# EAGLE board Board (EAGLE 9.2.2)
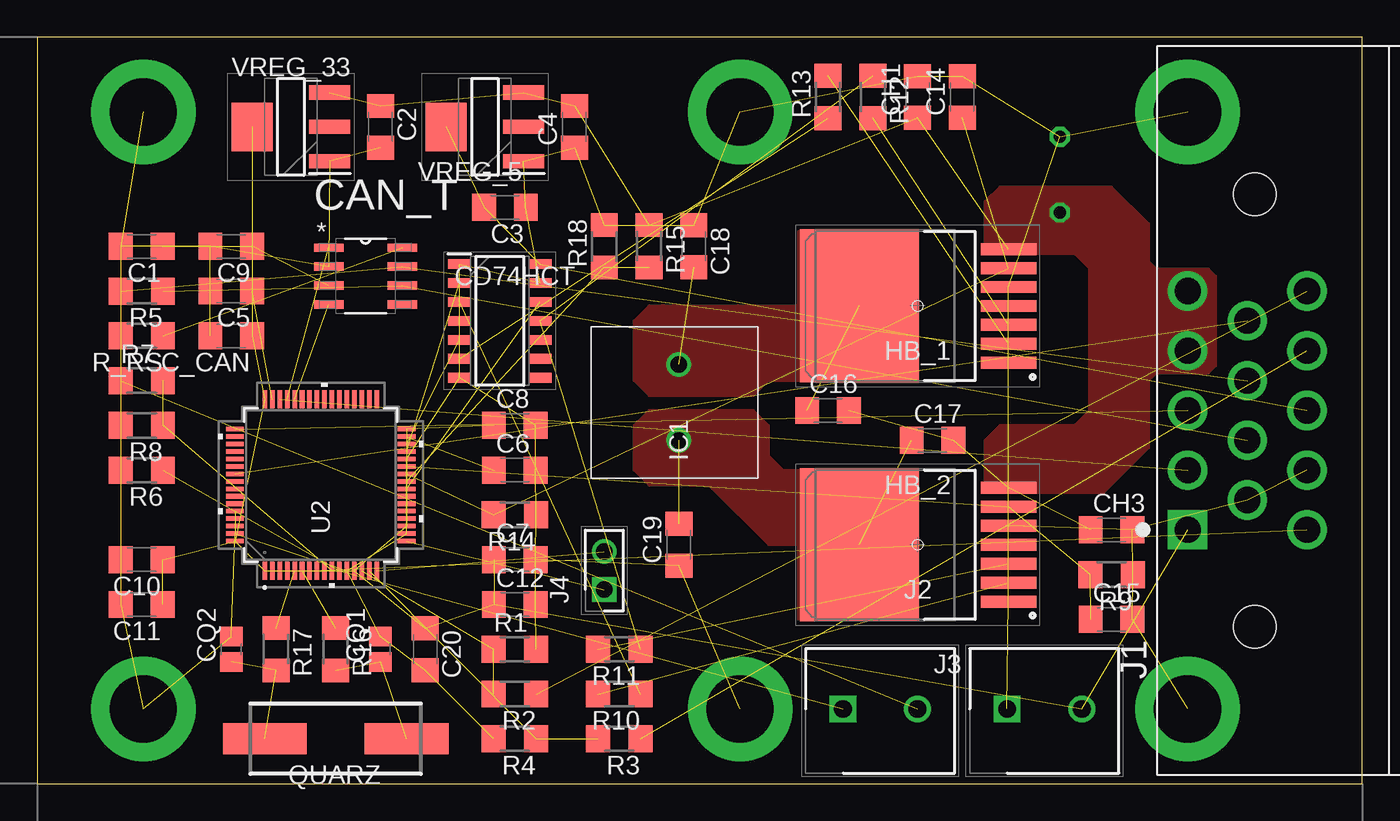
[diagram p0: board, top side]
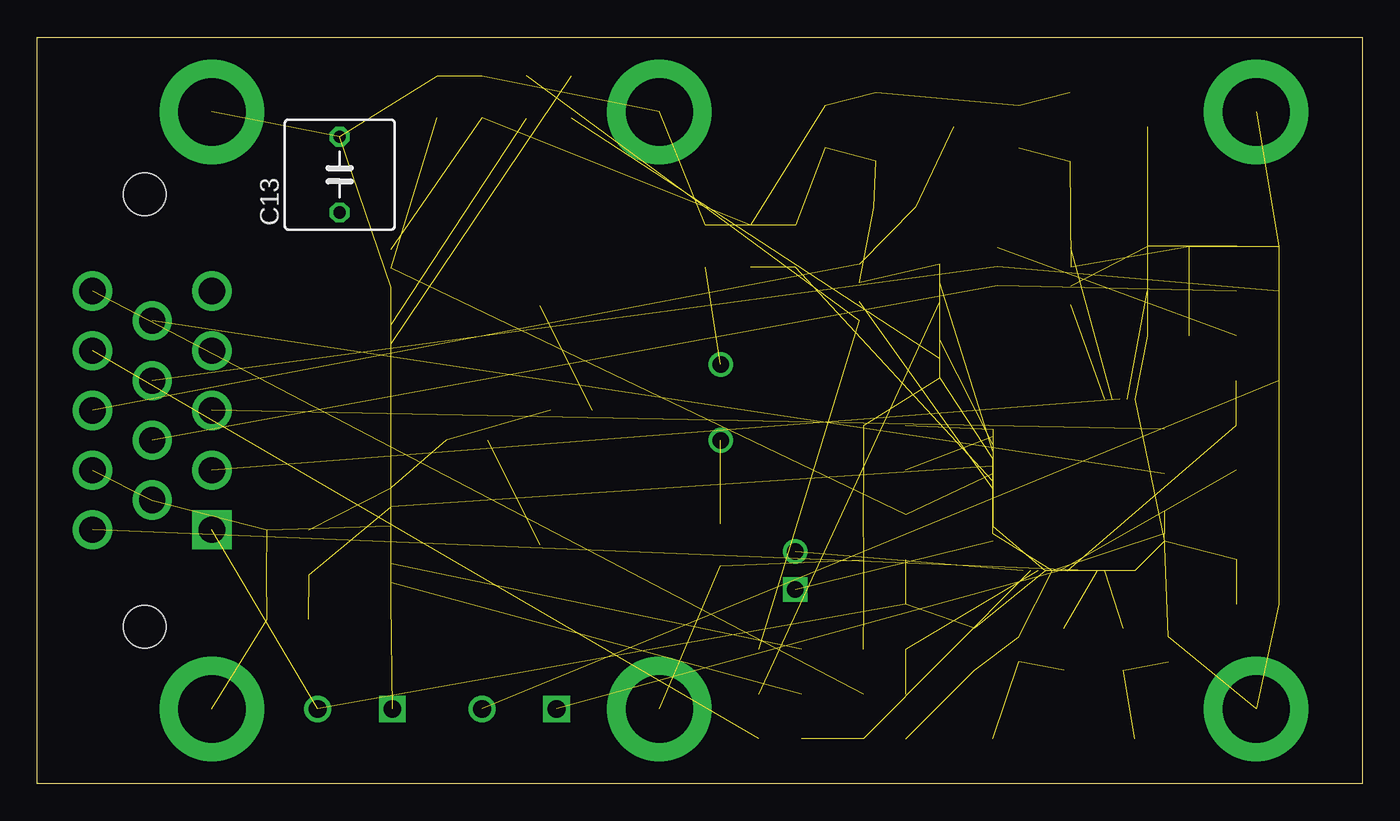
[diagram p1: board, bottom side, seen from below]

Size 88.8 x 50 mm. Coordinates in mm from the lower left corner, seen from the top.
Outline: 0,0 88.8,0 88.8,50 0,50 0,0
Copper layers (1*16): Top 0.035mm / dielectric 1.5mm / Bottom 0.035mm
Design rules "default": minimum track width 6mil, minimum drill 0.35mm, track to track 6mil, track to pad 6mil, pad to pad 6mil, via to via 6mil, smd to smd 6mil, copper to edge 40mil, drill to drill 6mil, minimum pad ring 10mil, minimum via ring 8mil, stop-mask expansion 4mil, vias tented up to drill 0mil, thermal gap 10mil
Net classes: 0 default: width 0.2 mm, drill 0.508 mm; 1 V12: width 0.6 mm, drill 0.8 mm

## Footprints (pad centres in the part's own frame; a part is rotated, then mirrored left to right if it is on the bottom)
C1206 = smd 1.6 x 1.8: 1 -1.4,0; 2 1.4,0
C050-075X075 = drill 0.813 octagon: 1 -2.54,0; 2 2.54,0
SOIC127P600X175-8N = smd 1.981 x 0.559: 1 -2.464,1.905; 2 -2.464,0.635; 3 -2.464,-0.635; 4 -2.464,-1.905; 5 2.464,-1.905; 6 2.464,-0.635; 7 2.464,0.635; 8 2.464,1.905
SOIC127P600X175-14N = smd 1.525 x 0.65: 1 -2.712,3.81; 2 -2.712,2.54; 3 -2.712,1.27; 4 -2.712,0; 5 -2.712,-1.27; 6 -2.712,-2.54; 7 -2.712,-3.81; 8 2.712,-3.81; 9 2.712,-2.54; 10 2.712,-1.27; 11 2.712,0; 12 2.712,1.27; 13 2.712,2.54; 14 2.712,3.81
C0805 = smd 1.3 x 1.5: 1 -0.85,0; 2 0.85,0
TO127P1500X440-8N = smd 3.7 x 0.8: 1 -6.1,3.81; 2 -6.1,2.54; 3 -6.1,1.27; 4 -6.1,0; 5 -6.1,-1.27; 6 -6.1,-2.54; 7 -6.1,-3.81 | smd 8 x 10.25: 8 3.9,0
PHEONIX-5.08PITCH-2PIN = drill 1.1 pad 1.65: 1 0,0; 2 5.08,0
TE_1-776267-1 = drill 1.75 square: 1 -8,4.5 | drill 1.75: 2 -4,4.5; 3 0,4.5; 4 4,4.5; 5 8,4.5; 6 -6,0.5; 7 -2,0.5; 8 2,0.5; 9 6,0.5; 10 -8,-3.5; 11 -4,-3.5; 12 0,-3.5; 13 4,-3.5; 14 8,-3.5 | hole 2.85: -14.5,0; 14.5,0
SHDR2W100P0X500_1X2_1000X820X1 = drill 1.2 pad 1.8 square: 1 0,0 | drill 1.2 pad 1.8: 2 5,0
HDRV2W64P0X254_1X2_508X254X864 = drill 1.1 pad 1.65 square: 1 0,0 | drill 1.1 pad 1.65: 2 2.54,0
ABLS-12.000MHZ-B2 = smd 5.6 x 2.1: 1 -4.75,0; 2 4.75,0
R1206 = smd 1.6 x 1.803: 1 -1.422,0; 2 1.422,0
LQFP64-10X10MM = smd 1.194 x 0.305: 1 -5.75,3.75; 2 -5.75,3.25; 3 -5.75,2.75; 4 -5.75,2.25; 5 -5.75,1.75; 6 -5.75,1.25; 7 -5.75,0.75; 8 -5.75,0.25; 9 -5.75,-0.25; 10 -5.75,-0.75; 11 -5.75,-1.25; 12 -5.75,-1.75; 13 -5.75,-2.25; 14 -5.75,-2.75; 15 -5.75,-3.25; 16 -5.75,-3.75; 33 5.75,-3.75; 34 5.75,-3.25; 35 5.75,-2.75; 36 5.75,-2.25; 37 5.75,-1.75; 38 5.75,-1.25; 39 5.75,-0.75; 40 5.75,-0.25; 41 5.75,0.25; 42 5.75,0.75; 43 5.75,1.25; 44 5.75,1.75; 45 5.75,2.25; 46 5.75,2.75; 47 5.75,3.25; 48 5.75,3.75 | smd 0.305 x 1.194: 17 -3.75,-5.75; 18 -3.25,-5.75; 19 -2.75,-5.75; 20 -2.25,-5.75; 21 -1.75,-5.75; 22 -1.25,-5.75; 23 -0.75,-5.75; 24 -0.25,-5.75; 25 0.25,-5.75; 26 0.75,-5.75; 27 1.25,-5.75; 28 1.75,-5.75; 29 2.25,-5.75; 30 2.75,-5.75; 31 3.25,-5.75; 32 3.75,-5.75; 49 3.75,5.75; 50 3.25,5.75; 51 2.75,5.75; 52 2.25,5.75; 53 1.75,5.75; 54 1.25,5.75; 55 0.75,5.75; 56 0.25,5.75; 57 -0.25,5.75; 58 -0.75,5.75; 59 -1.25,5.75; 60 -1.75,5.75; 61 -2.25,5.75; 62 -2.75,5.75; 63 -3.25,5.75; 64 -3.75,5.75
SOT230P700X180-4N = smd 2.75 x 0.95: 1 -2.6,2.3; 2 -2.6,0; 3 -2.6,-2.3 | smd 2.75 x 3.25: 4 2.6,0

## Placement (x,y rotation side)
C1  4.7uF  [C1206]  7,36 180 top
C2  1uF  [C1206]  23,44 270 top
C3  4.7uF  [C1206]  31.34,38.61 180 top
C4  1uF  [C1206]  36,44 90 top
C5  2.2uF  [C1206]  13,33 180 top
C6  2.2uF  [C1206]  32,21 0 top
C7  100nF  [C1206]  32,15 0 top
C8  100nF  [C1206]  32,24 0 top
C9  100nF  [C1206]  13,36 180 top
C10  100nF  [C1206]  7,15 180 top
C11  4.7uF  [C1206]  7,12 180 top
C12  100nF  [C1206]  32,12 0 top
C13  470uF  [C050-075X075]  68.53,40.8 90 bottom
C14  1nF  [C1206]  62,46 90 top
C15  1nF  [C1206]  72,11 0 top
C16  220nF  [C1206]  53,25 0 top
C17  220nF  [C1206]  60,23 0 top
C18  220nF  [C1206]  44,36 270 top
C19  220nF  [C1206]  43,16 90 top
C20  1 uF  [C1206]  26,9 270 top
C_CAN  100nF  [C1206]  13,30 180 top
CAN_T  SN65HVD230QD  [SOIC127P600X175-8N]  22,34 0 top
CD74HCT  CD74HCT125M  [SOIC127P600X175-14N]  31,31 0 top
CH1  100nF  [C1206]  59,46 90 top
CH3  100nF  [C1206]  72,17 0 top
CQ1  22pF  [C0805]  23,9 90 top
CQ2  22pF  [C0805]  13,9 90 top
HB_1  BTN8982TA  [TO127P1500X440-8N]  59,32 180 top
HB_2  BTN8982TA  [TO127P1500X440-8N]  59,16 180 top
IC1  1711725  [PHEONIX-5.08PITCH-2PIN]  43,23 90 top
J1  1-776267-1  [TE_1-776267-1]  81.6,25 90 top
J2  282836-2  [SHDR2W100P0X500_1X2_1000X820X1]  54,5 0 top
J3  282836-2  [SHDR2W100P0X500_1X2_1000X820X1]  65,5 0 top
J4  M20-9990246  [HDRV2W64P0X254_1X2_508X254X864]  38,13 90 top
QUARZ  ABLS-8.000MHZ-K4T  [ABLS-12.000MHZ-B2]  20,3 180 top
R1  [R1206]  32,9 0 top
R2  [R1206]  32,6 180 top
R3  [R1206]  39,3 180 top
R4  [R1206]  32,3 180 top
R5  100  [R1206]  7,33 180 top
R6  [R1206]  7,21 180 top
R7  [R1206]  7,27 0 top
R8  [R1206]  7,24 180 top
R9  1k  [R1206]  72,14 180 top
R10  10K  [R1206]  39,6 180 top
R11  10K  [R1206]  39,9 180 top
R12  10K  [R1206]  56,46 270 top
R13  10K  [R1206]  53,46 90 top
R14  1k  [R1206]  32,18 180 top
R15  [R1206]  41,36 270 top
R16  220  [R1206]  20,9 270 top
R17  0  [R1206]  16,9 270 top
R18  [R1206]  38,36 90 top
R_RS  10  [R1206]  7,30 180 top
U2  STM32F4X5RG  [LQFP64-10X10MM]  19,20 90 top
VREG_5  LDL1117S50R  [SOT230P700X180-4N]  30,44 180 top
VREG_33  LDL1117S33R  [SOT230P700X180-4N]  17,44 180 top

## Library data of the parts
C1-C20 C_CAN CH1 CH3 CQ1 CQ2 R1-R18 R_RS = adafruit
CAN_T = ADP_Components; MF: TEXAS INSTRUMENTS; MPN: SN65HVD230QD..; OC_FARNELL: 1648752; OC_NEWARK: 75C7746; PACKAGE: SOIC-8; SUPPLIER: Texas Instruments
CD74HCT = SamacSys_Parts; DESCRIPTION: High Speed CMOS Logic Quad Buffers with 3-State Outputs; HEIGHT: 1.75mm; MANUFACTURER_NAME: Texas Instruments; MANUFACTURER_PART_NUMBER: CD74HCT125M; MOUSER_PART_NUMBER: 595-CD74HCT125M
HB_1 HB_2 = SamacSys_Parts; DESCRIPTION: New Infineon BTN8982TA Motor Driver,, 7-Pin TO-263-7-1; HEIGHT: 4.4mm; MANUFACTURER_NAME: Infineon; MANUFACTURER_PART_NUMBER: BTN8982TA; MOUSER_PART_NUMBER: 726-BTN8982TA
IC1 = SamacSys_Parts; DESCRIPTION: Non-Fused Terminal Block Through Hole, 2 Way, Solder, Nylon, 250 V; HEIGHT: mm; MANUFACTURER_NAME: Phoenix Contact; MANUFACTURER_PART_NUMBER: 1711725; MOUSER_PART_NUMBER: 651-1711725; MOUSER_PRICE-STOCK: https://www.mouser.com/Search/Refine.aspx?Keyword=651-1711725
J1 = 1-776267-1; COMMENT: 1-776267-1; DESCRIPTION: AMPSEAL 14 Position 4 mm Pitch Triple Row Wire to Board Right Angle Header; DIGI-KEY_PART_NUMBER: A142413-ND; DIGI-KEY_PURCHASE_URL: https://www.digikey.com/product-detail/en/te-connectivity-amp-connectors/1-776267-1/A142413-ND/5428565?utm_source=snapeda&utm_medium=aggregator&utm_campaign=symbol; EU_ROHS_COMPLIANCE: Compliant; MF: TE Connectivity; MP: 1-776267-1; PACKAGE: None; TE_PURCHASE_URL: https://www.te.com/usa-en/product-1-776267-1.html?te_bu=Cor&te_type=disp&te_campaign=seda_glo_cor-seda-global-disp-prtnr-fy19-seda-model-bom-cta_sma-317_1&elqCampaignId=32493
J2 J3 = SamacSys_Parts; DESCRIPTION: TERMINAL BLOCK, PCB MOUNT, SIDE WIRE ENTRY, STACKING , 5.00mm PITCH; HEIGHT: 10.2mm; MANUFACTURER_NAME: TE Connectivity; MANUFACTURER_PART_NUMBER: 282836-2; MOUSER_PART_NUMBER: 571-2828362
J4 = SamacSys_Parts; DESCRIPTION: HARWIN M20-9990246. Board-To-Board Connector, Straight, 2.54 mm, 2 Contacts, Header, M20 Series, Through Hole; HEIGHT: 8.64mm; MANUFACTURER_NAME: HARWIN; MANUFACTURER_PART_NUMBER: M20-9990246; MOUSER_PART_NUMBER: 855-M20-9990246
QUARZ = SamacSys_Parts; DESCRIPTION: ABRACON - ABLS-8.000MHZ-K4T - CRYSTAL, 8MHZ, 18PF, HC-49US; HEIGHT: mm; MANUFACTURER_NAME: ABRACON; MANUFACTURER_PART_NUMBER: ABLS-8.000MHZ-K4T; MF: ABRACON; MOUSER_PART_NUMBER: 815-ABLS-8.0MK4-T; MPN: ABLS-8.000MHZ-K4T; OC_FARNELL: 2467758
U2 = ADP_Components; MANUFACTURER_PART_NUMBER: STM32F4X5RG; OC_FARNELL: unknown; VENDOR: STMicroelectronics
VREG_5 = SamacSys_Parts; DESCRIPTION: STMICROELECTRONICS - LDL1117S50R - LDO, FIXED, 5V, 1.2A, SOT-223-3; HEIGHT: 1.8mm; MANUFACTURER_NAME: STMicroelectronics; MANUFACTURER_PART_NUMBER: LDL1117S50R; MF: STMICROELECTRONICS; MOUSER_PART_NUMBER: 511-LDL1117S50R; MPN: LDL1117S50R; OC_FARNELL: 2729709
VREG_33 = SamacSys_Parts; DESCRIPTION: STMICROELECTRONICS - LDL1117S33R - LDO, FIXED, 3.3V, 1.2A, SOT-223-3; HEIGHT: 1.8mm; MANUFACTURER_NAME: STMicroelectronics; MANUFACTURER_PART_NUMBER: LDL1117S33R; MF: STMICROELECTRONICS; MOUSER_PART_NUMBER: 511-LDL1117S33R; MPN: LDL1117S33R; OC_FARNELL: 2729708

## Nets
CAN1_RX: CAN_T.4 U2.44
CAN1_TX: CAN_T.1 U2.45
CAN_RS: CAN_T.8 R_RS.1
CANH: CAN_T.7 J1.8 R5.2
CANL: CAN_T.6 J1.7 R5.1
GND: C1.2 C2.2 C3.1 C4.1 C5.2 C6.2 C7.2 C8.2 C9.2 C10.2 C11.2 C12.2 C13.2 C14.2 C15.2 C18.1 C19.1 C20.2 C_CAN.2 CAN_T.2 CD74HCT.1 CD74HCT.4 CD74HCT.7 CD74HCT.13 CH1.2 CH3.2 CQ1.2 CQ2.2 HB_1.1 HB_1.5 HB_2.1 HB_2.5 J1.6 J1.11 J3.1 R1.2 R4.2 R6.2 R8.2 R9.1 R14.1 R18.2 R_RS.2 U2.12 U2.18 U2.28 U2.60 U2.63 VREG_5.1 VREG_33.1
HB1_IN: HB_1.2 R13.2
HB1_INH: HB_1.3 R12.2
HB2_IN: HB_2.2 R10.2
HB2_INH: HB_2.3 R11.2
IN_1: CD74HCT.6 R13.1
IN_2: CD74HCT.3 R10.1
IN_M_1: CD74HCT.5 U2.30
IN_M_2: CD74HCT.2 U2.29
INH: CD74HCT.11 R11.1 R12.1
INH_M: CD74HCT.12 U2.24
IS_1: C14.1 HB_1.6 R14.2 U2.26
IS_2: C15.1 HB_2.6 R9.2 U2.27
L_1: J1.13 R3.1
L_2: J1.14 R2.1
NRST: J1.10 U2.7
OSC_IN: R17.1 U2.5
OSC_OUT: R16.1 U2.6
PA0: R1.1 R2.2 U2.14
PA1: R3.2 R4.1 U2.15
PC2: R7.2 R8.1 U2.10
PC5: R15.2 R18.1 U2.25
Q_IN: CQ2.1 QUARZ.2 R17.2
Q_OUT: CQ1.1 QUARZ.1 R16.2
SWCLK: J1.3 U2.49
SWDIO: J1.2 U2.46
T_1: J2.1 R6.1 U2.11
TRACESWO: J1.9 U2.55
U_RX: J4.1 U2.17
U_TX: J4.2 U2.16
V5: C3.2 CD74HCT.14 J1.12 VREG_5.4
V12: C2.1 C4.2 C13.1 C16.2 C17.2 CH1.1 CH3.1 HB_1.7 HB_2.7 J1.4 J1.5 R15.1 VREG_5.3 VREG_33.3
V33: C1.1 C7.1 C8.1 C9.1 C10.1 C11.1 C12.1 C20.1 C_CAN.1 CAN_T.3 J1.1 J3.2 U2.1 U2.13 U2.19 U2.32 U2.48 U2.64 VREG_33.4
V_MOT_MIN: C17.1 C19.2 HB_2.8 IC1.1
V_MOT_PL: C16.1 C18.2 HB_1.8 IC1.2
VCAP_1: C6.1 U2.31
VCAP_2: C5.1 U2.47
Z_1: J2.2 R7.1

## Tracks (layer width: path | path; a pad name or v marks a point on that pad's centre or on a via)
CAN1_RX  (1 unrouted)
CAN1_TX  (1 unrouted)
CAN_RS  (1 unrouted)
CANH  (2 unrouted)
CANL  (2 unrouted)
GND  (via drill 4.5 pad 7)  (55 unrouted)
  other vias: 7.1,45 47.1,45 77.1,45 7.1,5 47.1,5 77.1,5
HB1_IN  (1 unrouted)
HB1_INH  (1 unrouted)
HB2_IN  (1 unrouted)
HB2_INH  (1 unrouted)
IN_1  (1 unrouted)
IN_2  (1 unrouted)
IN_M_1  (1 unrouted)
IN_M_2  (1 unrouted)
INH  (2 unrouted)
INH_M  (1 unrouted)
IS_1  (3 unrouted)
IS_2  (3 unrouted)
L_1  (1 unrouted)
L_2  (1 unrouted)
NRST  (1 unrouted)
OSC_IN  (1 unrouted)
OSC_OUT  (1 unrouted)
PA0  (2 unrouted)
PA1  (2 unrouted)
PC2  (2 unrouted)
PC5  (2 unrouted)
Q_IN  (2 unrouted)
Q_OUT  (2 unrouted)
SWCLK  (1 unrouted)
SWDIO  (1 unrouted)
T_1  (2 unrouted)
TRACESWO  (1 unrouted)
U_RX  (1 unrouted)
U_TX  (1 unrouted)
V5  (3 unrouted)
V12  (9 unrouted)
  pour Top (no thermals): 63.5,19.5 71.5,19.5 74.5,22.5 74.5,27 75,27.5 78.5,27.5 79,28 79,34 78.5,34.5 75,34.5 74.5,35 74.5,37.5 72,40 64.5,40 63.5,39 63.5,35.5 69.5,35.5 70.5,34.5 70.5,25 69.5,24 64.5,24 63.5,23
V33  (18 unrouted)
V_MOT_MIN  (2 unrouted)
  pour Top (no thermals): 41,25 48,25 49,24 49,22 50,21 59,21 59,11 52,11 51,11 51,16 49,16 45,20 42,20 41,20 40,21 40,24
V_MOT_PL  (2 unrouted)
  pour Top (no thermals): 59,37 51,37 51,32 41,32 40,31 40,27 41,26 48,26 49,27 59,27
VCAP_1  (1 unrouted)
VCAP_2  (1 unrouted)
Z_1  (1 unrouted)